# Altium PCB SAS_UFL_Adapter.PcbDoc
Units mm, origin at the board's own origin, x right, y up, seen from the top; angles counter-clockwise.
Board outline 34.53 x 19.2 mm, 4 copper layers (Top Layer, Layer 1, Layer 2, Bottom Layer), stack 1.001 mm thick; 9 components, 25 nets, 60 pads, 9 vias.
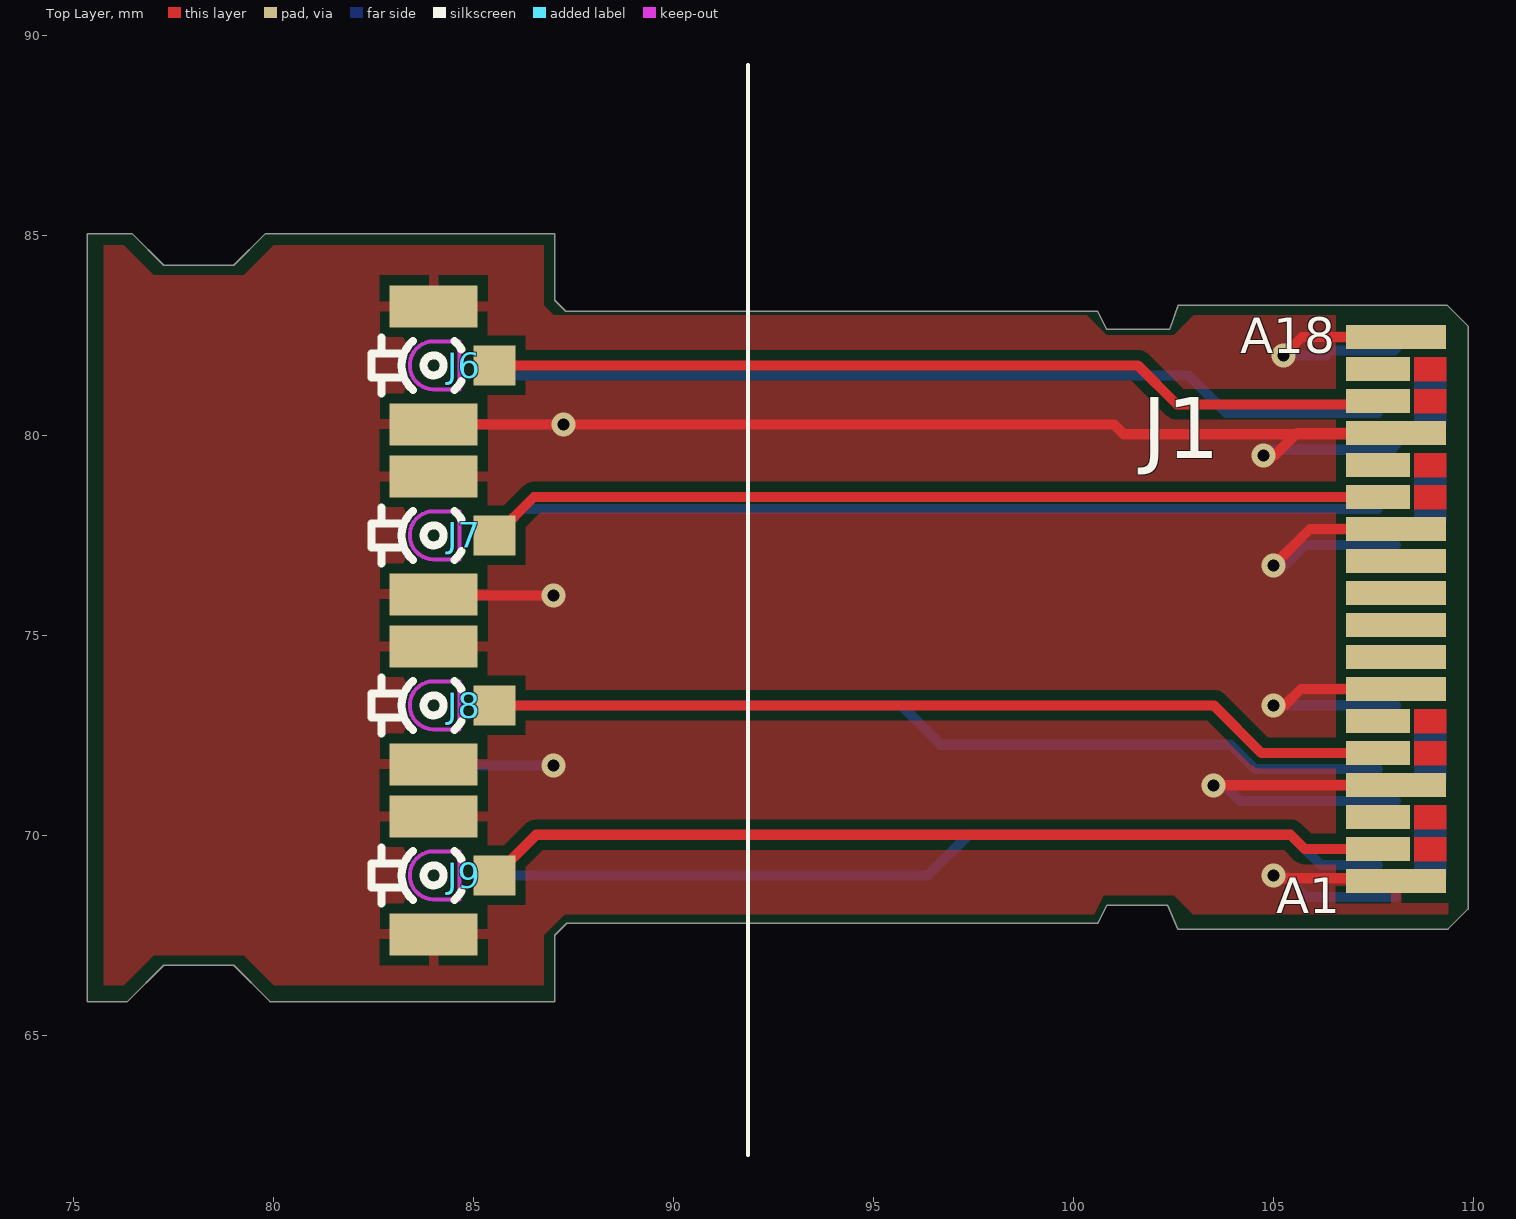
[diagram p0: Top Layer view]
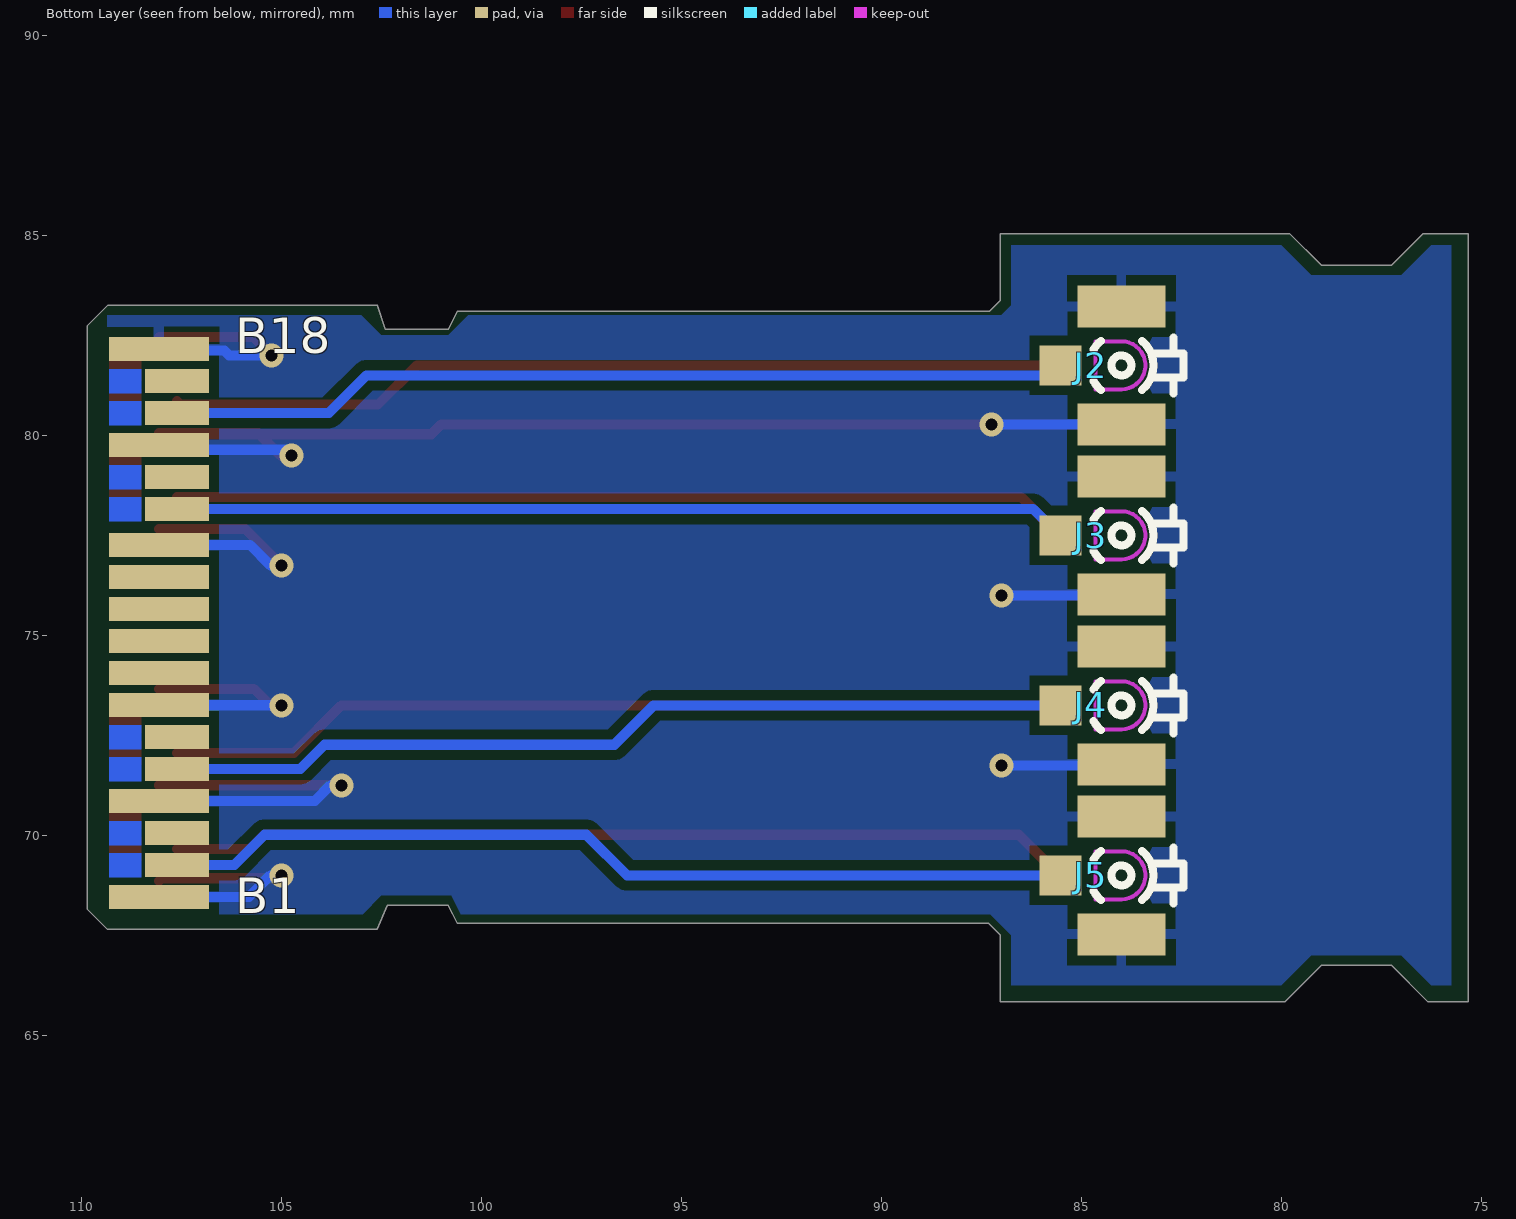
[diagram p1: Bottom Layer view, seen from below]
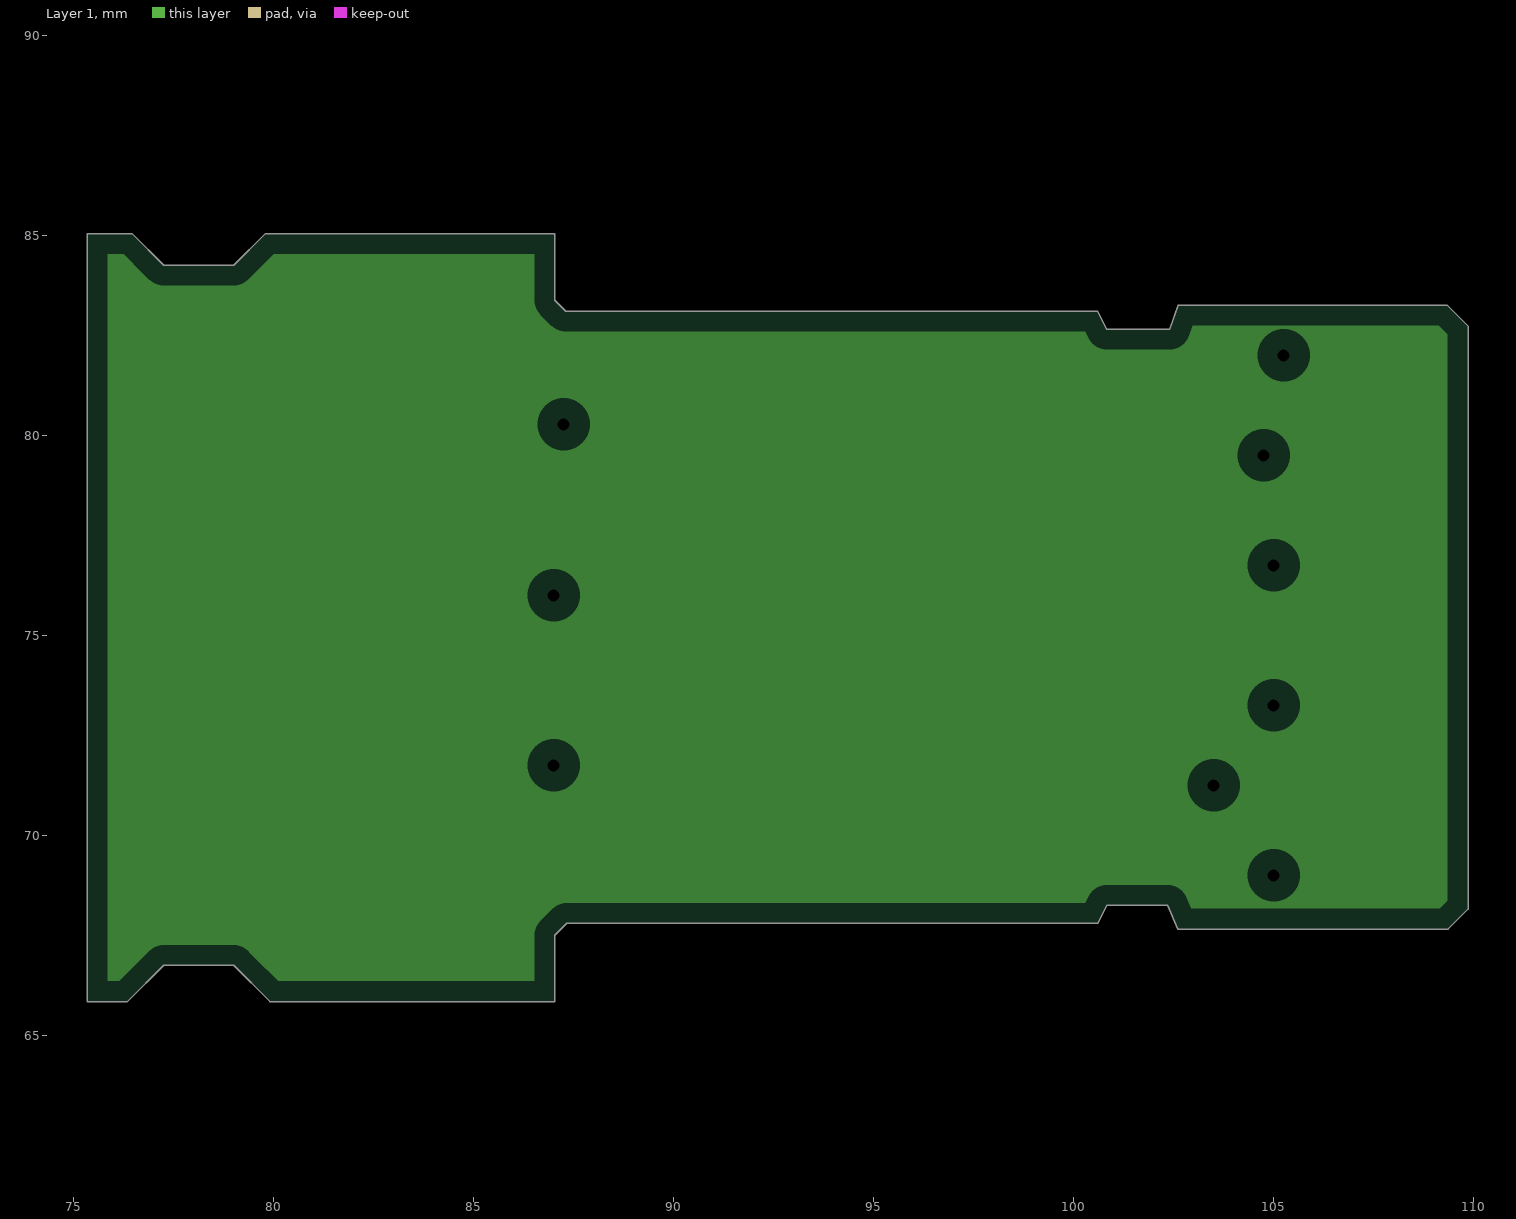
[diagram p2: Layer 1, clearances drawn from the general rule]
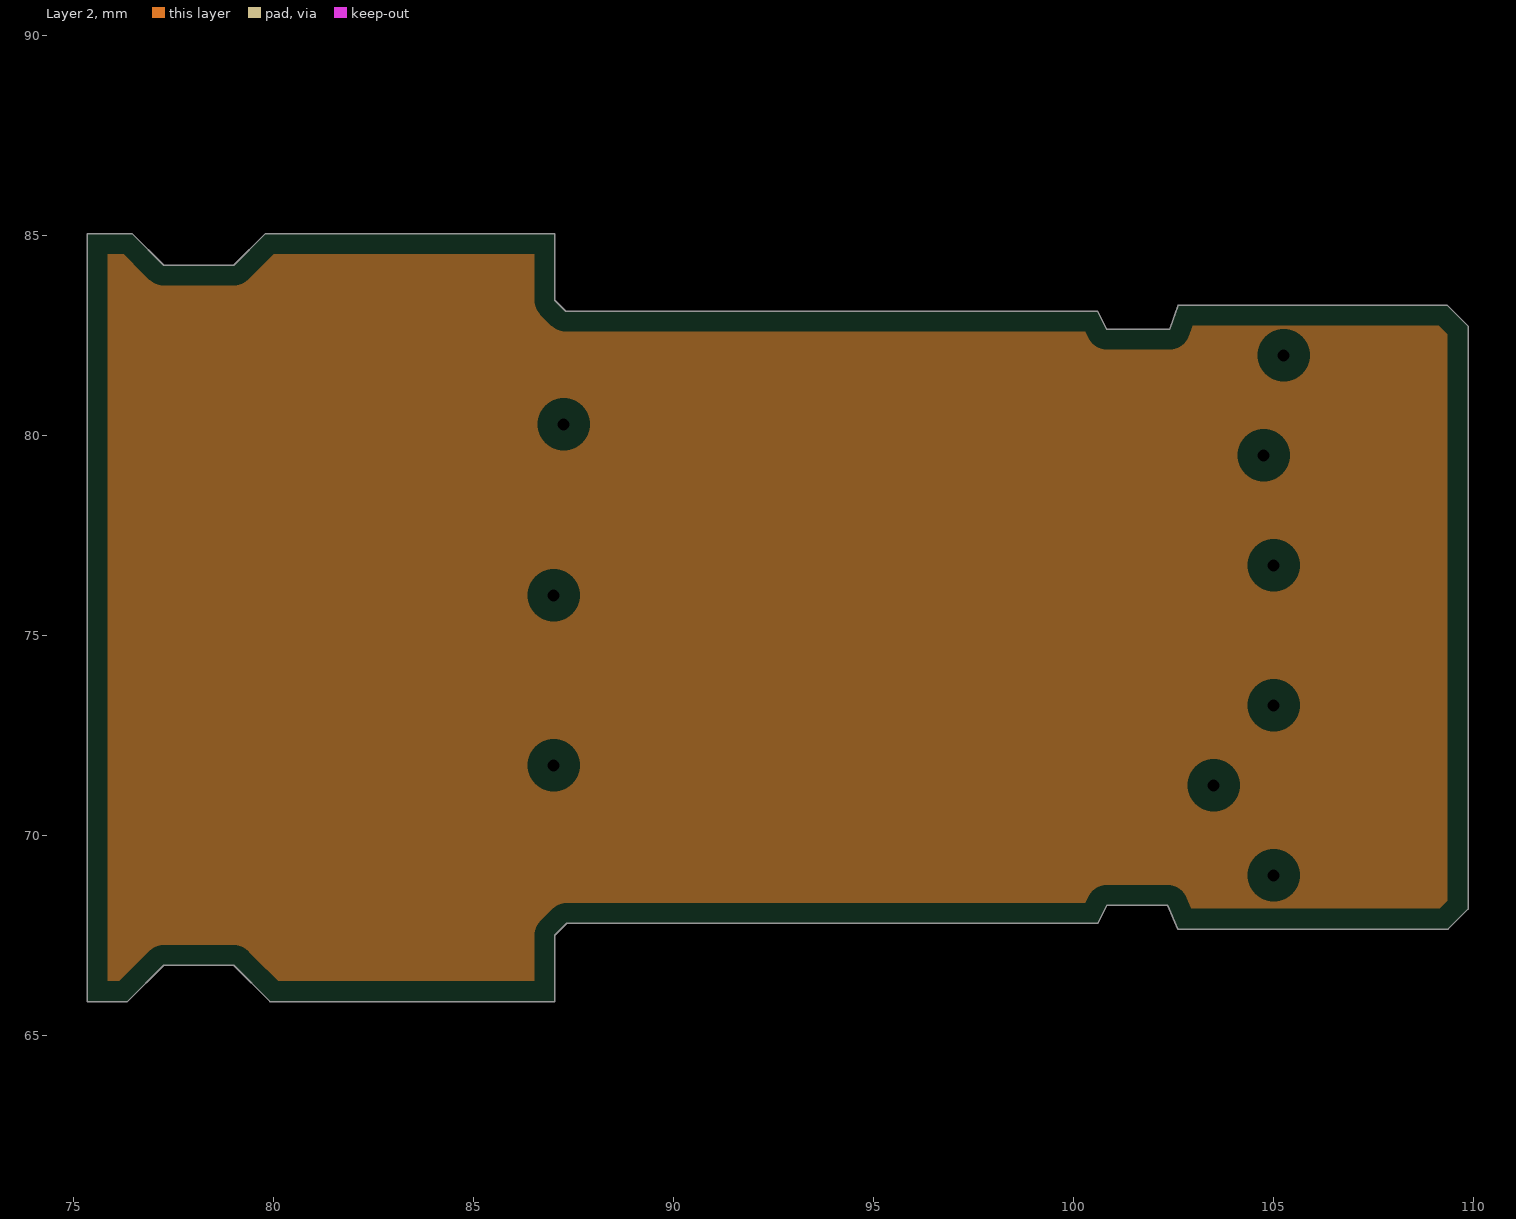
[diagram p3: Layer 2, clearances drawn from the general rule]
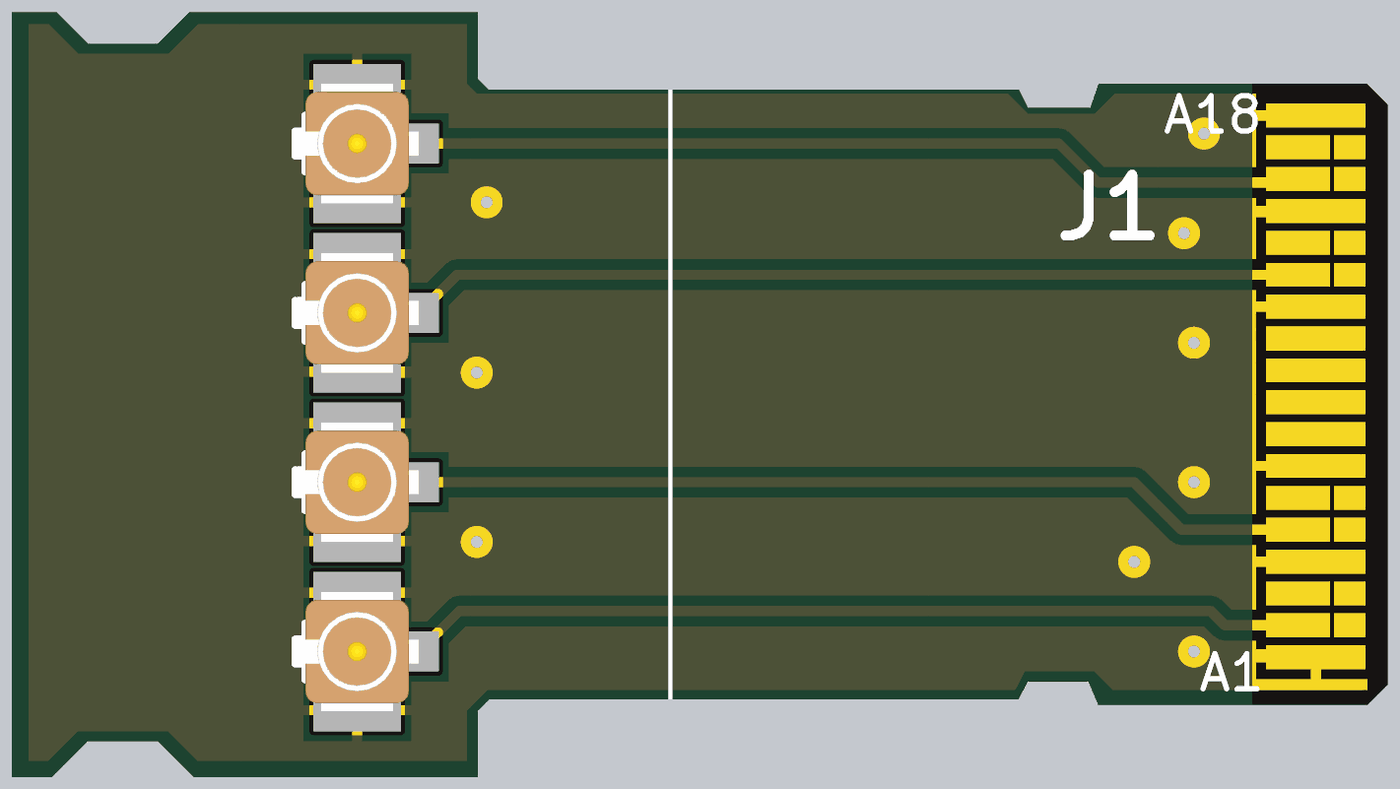
[diagram p4: 3D render of the assembled board from above, using the file's embedded part models]
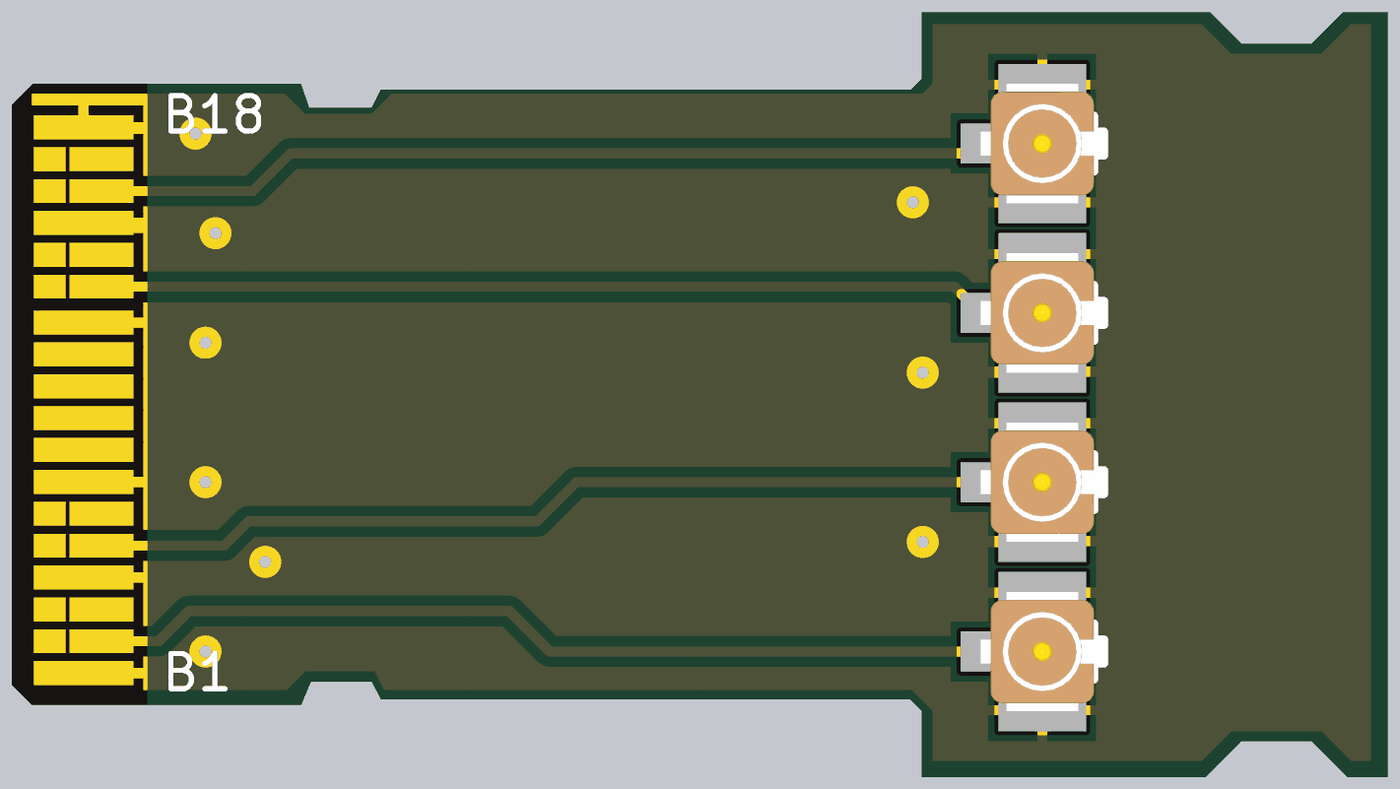
[diagram p5: 3D render of the assembled board from below, using the file's embedded part models]

## Layer stack, top to bottom
Top Solder: solder mask 0.0102, Solder Resist, Dk 3.5
Top Layer: signal copper 0.0356
Dielectric 2: prepreg 0.18, PP-006, Dk 4.1
Layer 1: plane copper 0.035
Dielectric 1: dielectric 0.5, FR-4, Dk 4.8
Layer 2: plane copper 0.035
Dielectric 3: prepreg 0.18, PP-006, Dk 4.1
Bottom Layer: signal copper 0.0356
Bottom Solder: solder mask 0.0102, Solder Resist, Dk 3.5

## Board outline
75.334,65.845 76.345,65.845 77.25,66.75 79,66.75 79.905,65.845 87.025,65.845 87.025,67.5 87.325,67.8 100.597,67.8 100.825,68.25 102.35,68.25 102.6,67.658 109.359,67.658 109.859,68.157 109.859,82.732 109.334,83.257 102.609,83.257 102.4,82.65 100.825,82.65 100.603,83.1 87.3,83.1 87.025,83.375 87.025,85.045 79.795,85.045 79,84.25 77.25,84.25 76.455,85.045 75.334,85.045

## Design rules (kind name [scope] priority, off if disabled: settings)
Clearance [All] p1: gap=0.254 ignorepadtopadclearanceinfootprint=FALSE except(0: Arc-Hole Track-Hole SMDPad-Hole THPad-Hole Via-Hole Fill-Hole Poly-Hole Region-Hole Text-Hole)
PlaneClearance [All] p1: clearance=0.508
PlaneConnect [All] p1: planeconnectstyle=Relief reliefexpansion=0.508 reliefentries=4 reliefconductorwidth=0.254 reliefairgap=0.254
PolygonConnect [All] p1: thpad.connectstyle=Relief thpad.reliefconductorwidth=0.254 thpad.reliefentries=4 thpad.polygonreliefangle="90 Angle" thpad.airgapwidth=0.254 smdpad.connectstyle=Relief smdpad.reliefconductorwidth=0.254 smdpad.reliefentries=4 smdpad.polygonreliefangle="90 Angle" smdpad.airgapwidth=0.254 via.connectstyle=Direct via.reliefconductorwidth=0.254 via.reliefentries=4 via.polygonreliefangle="90 Angle" via.airgapwidth=0.254
RoomDefinition SAS_UFL_Adapter [InComponentClass('SAS_UFL_Adapter')] p1: confinementstyle=ConfineIn formatcopy=TRUE lockcomponents=FALSE outline 90.439,40.852 92.95,40.852 92.95,53.265 90.439,53.265
RoutingVias [All] p1: holewidth=0.711 width=1.27 viastyle="Through Hole" minholewidth=0.711 minwidth=1.27 maxholewidth=0.711 maxwidth=1.27
SolderMaskExpansion [All] p1: expansion=0.102 istentingtop=FALSE
Width [All] p1: maxlimit=0.254 minlimit=0.254 preferedwidth=0.254
28 further rules are at their usual default settings.

## Components (designator, comment, footprint, x,y, rotation, side; value= is the part's Value field where it differs from the comment)
J1 "mini-SAS" mini_SAS_PCB_EDGE 107.834,75.457 r0 top
J2 "U.FL" HIROSE_U.FL-R-SMT-1(10) 84,81.75 r270 bottom
J3 "U.FL" HIROSE_U.FL-R-SMT-1(10) 84,77.5 r270 bottom
J4 "U.FL" HIROSE_U.FL-R-SMT-1(10) 84,73.25 r270 bottom
J5 "U.FL" HIROSE_U.FL-R-SMT-1(10) 84,69 r270 bottom
J6 "U.FL" HIROSE_U.FL-R-SMT-1(10) 84,81.75 r90 top
J7 "U.FL" HIROSE_U.FL-R-SMT-1(10) 84,77.5 r90 top
J8 "U.FL" HIROSE_U.FL-R-SMT-1(10) 84,73.25 r90 top
J9 "U.FL" HIROSE_U.FL-R-SMT-1(10) 84,69 r90 top

## Footprints (in the part's own frame and the unit in brackets; to place one, negate y for a bottom-side part, rotate by r counter-clockwise, add the part's x,y. Pads: shape width x height; smd on the part's side, far side on the other; paste and mask are expansions set on the pad)
HIROSE_U.FL-R-SMT-1(10) [mm] "Up to 6GHz Ultra Small Surface Mount Male Coaxial Connectors U.FL Series"
  rect 1x1.05 smd: 1(0,-1.525)
  rect 1.05x2.2 smd: 2(-1.475,0) 2(1.475,0)
  Top Layer keep-out lines w0.1: 0.6,0 ccw(c0,0) -0.6,0 -0.6,-0.65 0.6,-0.65 0.6,0
  silkscreen extent -0.7,-0.69 0.7,1.55, body extent -1.5,-1.55 1.5,1.55, height 1.25
mini_SAS_PCB_EDGE [mm] "36 contacts Board Eddge mini SAS Connector"
  rect 2.5x0.6 smd far side paste-0.4: A1(0.225,-7) A4(0.225,-4.6) A7(0.225,-2.2) A8(0.225,-1.4) A9(0.225,-0.6) A10(0.225,0.2) A11(0.225,1) A12(0.225,1.8) A15(0.225,4.3) A18(0.225,6.7)
  rect 1.6x0.6 smd far side paste-0.4: A2(-0.225,-6.2) A3(-0.225,-5.4) A5(-0.225,-3.8) A6(-0.225,-3) A13(-0.225,2.7) A14(-0.225,3.5) A16(-0.225,5.1) A17(-0.225,5.9)
  rect 2.5x0.6 smd paste-0.4: B1(0.225,-6.6) B4(0.225,-4.2) B7(0.225,-1.8) B8(0.225,-1) B9(0.225,-0.2) B10(0.225,0.6) B11(0.225,1.4) B12(0.225,2.2) B15(0.225,4.6) B18(0.225,7)
  rect 1.6x0.6 smd paste-0.4: B2(-0.225,-5.8) B3(-0.225,-5) B5(-0.225,-3.4) B6(-0.225,-2.6) B13(-0.225,3) B14(-0.225,3.8) B16(-0.225,5.4) B17(-0.225,6.2)
  Top Layer region: 0.675,5.1 0.675,5.7 1.475,5.7 1.475,5.1
  Top Layer region: 0.675,5.9 0.675,6.5 1.475,6.5 1.475,5.9
  Top Layer region: 0.675,2.7 0.675,3.3 1.475,3.3 1.475,2.7
  Top Layer region: 0.675,3.5 0.675,4.1 1.475,4.1 1.475,3.5
  Top Layer region: 0.675,-3.7 0.675,-3.1 1.475,-3.1 1.475,-3.7
  Top Layer region: 0.675,-2.9 0.675,-2.3 1.475,-2.3 1.475,-2.9
  Top Layer region: 0.675,-5.3 0.675,-4.7 1.475,-4.7 1.475,-5.3
  Top Layer region: 0.675,-6.1 0.675,-5.5 1.475,-5.5 1.475,-6.1
  Bottom Layer region: 0.675,6.2 0.675,5.6 1.475,5.6 1.475,6.2
  Bottom Layer region: 0.675,5.4 0.675,4.8 1.475,4.8 1.475,5.4
  Bottom Layer region: 0.675,3 0.675,2.4 1.475,2.4 1.475,3
  Bottom Layer region: 0.675,3.8 0.675,3.2 1.475,3.2 1.475,3.8
  Bottom Layer region: 0.675,-3.5 0.675,-4.1 1.475,-4.1 1.475,-3.5
  Bottom Layer region: 0.675,-2.7 0.675,-3.3 1.475,-3.3 1.475,-2.7
  Bottom Layer region: 0.675,-5.9 0.675,-6.5 1.475,-6.5 1.475,-5.9
  Bottom Layer region: 0.675,-5.1 0.675,-5.7 1.475,-5.7 1.475,-5.1

## Part data
J1: "36 Position mini-SAS PCB Edge Connector 36 (2x18)", Manufacturer=PCB, Manufacturer Part Number="gold fingers", Part Number=mini_SAS_PCB_EDGE, Author=GK, Component Type=Standard, ComponentHeight=0, CreateDate=12.11.2014, Family=mini-SAS, HelpURL=\\cern.ch\dfs\Applications\Altium\Datasheets\MOLEX_75783-0107.pdf, LatestRevisionDate=12.11.2014, Mounted=No, Part Description="36 Position mini-SAS PCB Edge Connector 36 (2x18)", Pin Count=36, PressFit=No, Sense=No, SMD=Yes, Socket=No, Status=None
J2 J3 J4 J5 J6 J7 J8 J9: library part HIROSE_U.FL-R-SMT-1(10), Manufacturer="HIROSE (HRS)", Manufacturer Part Number=U.FL-R-SMT-1(10), Author="CERN DEM JLC", Component Type=Standard, ComponentHeight=1.25mm, CreateDate=24.03.2010, Family=U.FL, HelpURL=\\cern.ch\dfs\Applications\Altium\Datasheets\HIROSE_U.FL-R-SMT-1(10).pdf, LatestRevisionDate=24.03.2010, Mounted=Yes, Part Description="Up to 6GHz Ultra Small Surface Mount Male Coaxial Connectors U.FL Series", Part Number=HIROSE_U.FL-R-SMT-1(10), Pin Count=2, PressFit=No, Sense=No, SMD=Yes, Socket=No, Status=None

## Via types
v1: diameter 0.6, hole 0.3, Top Layer to Bottom Layer, 9 vias

## Nets (pads, with @x,y where several pads share a name; then routed paths per layer and width w, separated by ;. In a path a pad name is that pad's centre, name@x,y a point inside that pad or via, vN(x,y) a via of type N, cw(c..) or ccw(c..) an arc to the next point about the centre after c; other vN are vias at no path point)
AFE_CTRL_0: J1.B8
AFE_CTRL_1: J1.A8
AFE_CTRL_2: J1.B9
AFE_CTRL_3: J1.A9
AFE_CTRL_4: J1.B10
AFE_CTRL_5: J1.A10
AFE_CTRL_6: J1.B11
AFE_CTRL_7: J1.A11
AOUT0_N: J1.B3
AOUT0_P: J1.B2 J9.1 | length 22.7
  Top Layer w0.254: J9.1 85.55,69 86.566,70.016 105.421,70.016 105.779,69.657 J1.B2
AOUT1_N: J1.A3
AOUT1_P: J1.A2 J5.1 | length 22.8
  Bottom Layer w0.254: J5.1 96.36,69 97.376,70.016 105.421,70.016 106.179,69.258 J1.A2
AOUT2_N: J1.B6
AOUT2_P: J1.B5 J8.1 | length 22.6
  Top Layer w0.254: J8.1 103.5,73.25 104.693,72.057 J1.B5
AOUT3_N: J1.A6
AOUT3_P: J1.A5 J4.1 | length 22.7
  Bottom Layer w0.254: J4.1 95.693,73.25 96.677,72.266 103.921,72.266 104.529,71.658 J1.A5
AOUT4_N: J1.B14
AOUT4_P: J1.B13 J7.1 | length 22.5
  Top Layer w0.254: J7.1 85.55,77.5 86.507,78.457 J1.B13
AOUT5_N: J1.A14
AOUT5_P: J1.A13 J3.1 | length 22.4
  Bottom Layer w0.254: J3.1 85.55,77.5 86.208,78.158 J1.A13
AOUT6_N: J1.B17
AOUT6_P: J1.B16 J6.1 | length 22.5
  Top Layer w0.254: J6.1 101.605,81.75 102.583,80.772 107.524,80.772 J1.B16
AOUT7_N: J1.A17
AOUT7_P: J1.A16 J2.1 | length 22.6
  Bottom Layer w0.254: J2.1 85.775,81.5 102.872,81.5 103.814,80.558 J1.A16
GND: J1.A1 J1.A4 J1.A7 J1.A12 J1.A15 J1.A18 J1.B1 J1.B4 J1.B7 J1.B12 J1.B15 J1.B18 J2.2 J3.2 J4.2 J5.2 J6.2 J7.2 J8.2 J9.2 | length 78
  Top Layer w0.254: J7.2@84,76.025 84.025,76 v1(87,76) ; J6.2@84,80.275 v1(87.25,80.275) 101.004,80.275 101.25,80.029 105.554,80.029 ; v1(103.5,71.25) 103.504,71.254 108.055,71.254 J1.B4 ; v1(104.75,79.5) 105.025,79.5 105.554,80.029 ; v1(105,69) 105.071,68.929 107.988,68.929 J1.B1 ; v1(105,73.25) 105.275,73.25 105.682,73.657 J1.B7 ; v1(105,76.75) 105.907,77.657 J1.B12 ; v1(105.25,82) 105.707,82.457 J1.B18 ; 105.554,80.029 108.03,80.029 J1.B15 105.582,80.057 105.554,80.029
  Bottom Layer w0.254: J4.2@84,71.775 84.025,71.75 v1(87,71.75) ; J3.2@84,76.025 84.025,76 v1(87,76) ; J2.2@84,80.275 v1(87.25,80.275) ; v1(103.5,71.25) 103.775,71.25 104.167,70.858 J1.A4 ; v1(104.75,79.5) 104.889,79.639 107.94,79.639 J1.A15 ; v1(105,69) 105.275,69 105.817,68.458 J1.A1 ; v1(105,73.25) 105.004,73.254 108.055,73.254 J1.A7 ; v1(105,76.75) 105.275,76.75 105.782,77.257 J1.A12 ; v1(105.25,82) 106.308,82 106.428,82.12 108.021,82.12 J1.A18

## Polygon pours and split planes (outlines as drawn)
GND on Bottom Layer "GND_L04_P000" (solid, remove dead copper, pour order 0): 75.75,84.75 76.25,84.75 77,84 79.25,84 80,84.75 86.75,84.75 86.75,83.25 87,83 100.325,83 100.825,82.5 102.5,82.5 103,83 109.359,83 109.359,68.028 102.972,68.028 102.5,68.5 100.753,68.5 100.514,68.028 87.278,68.028 86.75,67.5 86.75,66.25 80,66.25 79.25,67 77,67 76.25,66.25 75.75,66.25
GND on Top Layer "GND_L01_P001" (solid, remove dead copper, pour order 1): 75.75,84.75 76.25,84.75 77,84 79.25,84 80,84.75 86.75,84.75 86.75,83.25 87,83 100.325,83 100.825,82.5 102.5,82.5 103,83 109.359,83 109.359,68.028 102.972,68.028 102.5,68.5 100.753,68.5 100.514,68.028 87.278,68.028 86.75,67.5 86.75,66.25 80,66.25 79.25,67 77,67 76.25,66.25 75.75,66.25
no net on Layer 2 (split plane): 153 vertices, not listed, extent 75.844,66.355 109.349,84.535
no net on Layer 1 (split plane): 153 vertices, not listed, extent 75.844,66.355 109.349,84.535

## Silkscreen, mask and mechanical layers (free items; w line width, h text height)
Top Overlay:
  lines w0.1: 91.859,62.007 91.859,89.257
Mechanical 1:
  lines w0.1: 75.334,65.845 76.345,65.845 77.25,66.75 79,66.75 79.905,65.845 87.025,65.845 87.025,67.5 87.325,67.8 100.597,67.8 100.825,68.25 102.35,68.25 102.6,67.658 103.509,67.658 109.359,67.658 109.859,68.157 109.859,82.732 109.334,83.257 103.509,83.257 102.982,83.257 102.609,83.257 102.4,82.65 100.825,82.65 100.603,83.1 99.946,83.1 87.3,83.1 87.025,83.375 87.025,85.045 79.795,85.045 79,84.25 77.25,84.25 76.455,85.045 75.334,85.045 75.334,65.845
Mechanical 8:
  lines w0.1: 69.207,75.457 109.897,75.457

## Text inside footprints (layer, text, board x,y; h text height)
J1: Top Overlay "A1" at 105.059,68.057 h0.89; Top Overlay "A18" at 104.159,82.057 h0.89; Bottom Overlay "B1" at 106.159,68.057 h0.89; Bottom Overlay "B18" at 106.159,82.057 h0.89